# Altium PCB PCB_CPU_1.PcbDoc (part 2 of 2)
Units mm, origin at the board's own origin, x right, y up, seen from the top; angles counter-clockwise.
Board outline 195 x 54.5 mm, 2 copper layers (Top Layer, Bottom Layer); 53 components, 42 nets, 196 pads, 9 vias.
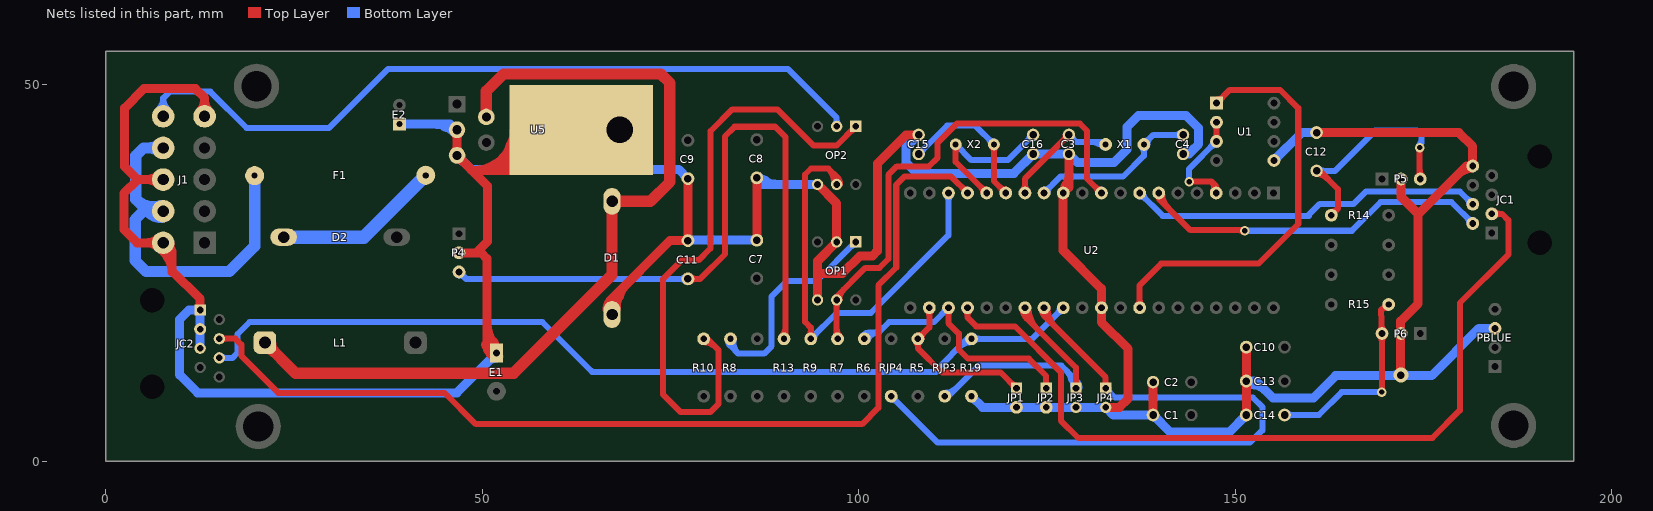
[diagram p2: the nets of this part, all layers, seen from the top]

## Via types
v1: diameter 1.27, hole 0.711, Top Layer to Bottom Layer, 8 vias
v2: diameter 2, hole 1, Top Layer to Bottom Layer, 1 vias

## Nets (pads, with @x,y where several pads share a name; then routed paths per layer and width w, separated by ;. In a path a pad name is that pad's centre, name@x,y a point inside that pad or via, vN(x,y) a via of type N, cw(c..) or ccw(c..) an arc to the next point about the centre after c; other vN are vias at no path point) (continued)
GND: C1.2 C2.2 C3.2 C4.1 C7.2 C8.1 C9.1 C10.1 C11.2 C12.2 C13.1 C14.2 C15.2 C16.1 D1.1 E1.1 E2.1 J1.2 J1.6 J1.9 JC1.8 JC2.1 JC2.3 JC2.5 JP1.2 JP2.2 JP3.2 JP4.2 OP1.2 OP1.8 OP2.8 P4.2 P5.2 P6.2 PBLUE.3 R19.2 U1.5 U2.12 U2.31 U5.0 U5.3 U5.5 | length 875.7
  Top Layer w1.2: J1.2@7.625,29.025 4.175,29.025 2.4,30.8 2.4,35.6 4.225,37.425 ; J1.6@7.625,37.425 4.225,37.425 ; J1.2@7.674,29.026 8.795,27.905 ; J1.2@8.315,28.447 ccw(c9.222,27.685) 8.332,26.903 ; JC2.1@12.54,20.094 12.54,21.594 8.795,25.339 8.795,27.905 ; J1.9@13.125,45.825 13.125,48.275 11.9,49.5 5.075,49.5 2.5,46.925 2.5,39.15 4.225,37.425 ; U5.3@46.653,44.041 U5.5@46.653,40.641 50.7,36.594 50.7,29.175 49.22,27.695 P4.2@46.92,27.695 49.855,27.695 50.625,26.925 50.625,15.65 E1.1@51.9,14.375 ; 48.8,38.6 57.744,38.6 U5.0@63.161,44.017 ; 53.521,41.322 cw(c59.413,39.718) U5.0@59.765,45.814 ; D1.1@67.25,19.5 67.25,21.625 74.94,29.315 C11.2@77.328,29.315 C9.1@77.328,37.55 ; D1.1@67.767,20.302 cw(c69.117,20.737) 68.114,21.74 ; C7.2@86.481,29.371 C8.1@86.481,37.652 ; OP1.8@94.548,21.441 94.548,24.8 ; OP2.8@94.548,36.787 97.088,34.247 OP1.2@97.088,29.146 94.548,26.606 94.548,24.8 ; C15.2@107.971,43.361 106.311,43.361 102.5,39.55 102.5,27.95 101.85,27.3 100.2,27.3 97.85,24.95 94.698,24.95 94.548,24.8 ; C3.2@127.935,40.821 127.935,36.402 U2.12@127.173,35.64 127.173,28.002 132.253,22.922 U2.31@132.253,20.4 132.253,18.486 135.8,14.939 135.8,8.325 134.645,7.17 JP4.2@132.826,7.17 ; C1.2@139.107,6.15 C2.2@139.107,10.519 ; C14.2@151.493,6.15 C13.1@151.493,10.659 C10.1@151.493,15.167 ; C12.2@160.828,43.666 179.734,43.666 181.57,41.83 JC1.8@181.57,39.22 180.72,39.22 174.325,32.825 174.325,20.95 171.99,18.615 171.99,11.485 v2(172.025,11.45) ; P5.2@172.065,37.5 172.065,35.11 174.325,32.85 ; 180.486,38.68 ccw(c180.117,40.059) JC1.8@181.353,39.345 ; 5.452,29.025 cw(c5.452,26.852) 6.989,28.389 ccw(c5.452,26.852) 5.452,29.025 ; 5.452,29.025 ccw(c5.452,31.198) 6.989,29.661 cw(c5.452,31.198) 5.452,29.025 ; 5.452,37.425 cw(c5.452,35.252) 6.989,36.789 ccw(c5.452,35.252) 5.452,37.425 ; 5.452,37.425 ccw(c5.452,39.598) 6.989,38.061 cw(c5.452,39.598) 5.452,37.425 ; 8.795,27.905 cw(c9.536,28.646) 8.508,28.85 ccw(c9.536,28.646) 8.795,27.905 ; 8.795,27.905 ccw(c8.11,27.22) 7.858,28.156 cw(c8.11,27.22) 8.795,27.905 ; 13.125,47.998 cw(c10.952,47.998) 12.489,46.461 ccw(c10.952,47.998) 13.125,47.998 ; 13.125,47.998 ccw(c15.298,47.998) 13.761,46.461 cw(c15.298,47.998) 13.125,47.998 ; U5.5@46.299,40.995 ccw(c45.446,41.848) 46.653,41.848 ; U5.5@46.299,40.995 ccw(c45.446,41.848) 46.653,41.848 ; U5.5@46.299,40.995 ccw(c45.446,41.848) 46.653,41.848 ; U5.3@46.299,43.687 cw(c45.446,42.834) 46.653,42.834 ; U5.3@46.299,43.687 cw(c45.446,42.834) 46.653,42.834 ; U5.3@46.299,43.687 cw(c45.446,42.834) 46.653,42.834 ; U5.5@46.653,40.141 cw(c46.653,38.934) 47.507,39.787 ; U5.5@46.653,40.141 cw(c46.653,38.934) 47.507,39.787 ; U5.5@46.653,40.141 cw(c46.653,38.934) 47.507,39.787 ; 46.653,41.848 ccw(c47.86,41.848) U5.5@47.007,40.995 ; 46.653,41.848 ccw(c47.86,41.848) U5.5@47.007,40.995 ; 46.653,41.848 ccw(c47.86,41.848) U5.5@47.007,40.995 ; 46.653,42.834 cw(c47.86,42.834) U5.3@47.007,43.687 ; 46.653,42.834 cw(c47.86,42.834) U5.3@47.007,43.687 ; 46.653,42.834 cw(c47.86,42.834) U5.3@47.007,43.687 ; U5.5@47.153,40.641 ccw(c48.36,40.641) 47.507,39.787 ; U5.5@47.153,40.641 ccw(c48.36,40.641) 47.507,39.787 ; U5.5@47.153,40.641 ccw(c48.36,40.641) 47.507,39.787 ; 50.43,15.485 ccw(c51.395,16.043) E1.1@51.808,15.007 ; 50.43,15.485 ccw(c51.395,16.043) E1.1@51.808,15.007 ; 50.43,15.485 ccw(c51.395,16.043) E1.1@51.808,15.007 ; 50.625,15.56 ccw(c52.685,15.56) E1.1@51.228,14.103 ; 50.625,15.56 ccw(c52.685,15.56) E1.1@51.228,14.103 ; 50.625,15.56 ccw(c52.685,15.56) E1.1@51.228,14.103 ; 50.625,18.457 ccw(c55.582,18.457) E1.1@52.077,14.952 ; 50.625,18.457 ccw(c55.582,18.457) E1.1@52.077,14.952 ; 50.625,18.457 ccw(c55.582,18.457) E1.1@52.077,14.952 ; 50.79,15.485 ccw(c51.9,16.594) E1.1@51.9,15.025 ; 50.79,15.485 ccw(c51.9,16.594) E1.1@51.9,15.025 ; 50.79,15.485 ccw(c51.9,16.594) E1.1@51.9,15.025 ; E1.1@51.124,14.284 ccw(c51.914,14.74) E1.1@52.251,13.892 ; E1.1@51.124,14.284 ccw(c51.914,14.74) E1.1@52.251,13.892 ; E1.1@51.124,14.284 ccw(c51.914,14.74) E1.1@52.251,13.892 ; 51.516,15.923 cw(c50.279,15.209) E1.1@51.659,14.84 ; 51.516,15.923 cw(c50.279,15.209) E1.1@51.659,14.84 ; 51.516,15.923 cw(c50.279,15.209) E1.1@51.659,14.84 ; D1.1@66.593,20.135 cw(c68.604,20.135) 67.182,21.557 ; D1.1@66.593,20.135 cw(c68.604,20.135) 67.182,21.557 ; D1.1@66.593,20.135 cw(c68.604,20.135) 67.182,21.557 ; D1.1@66.866,20.519 ccw(c65.939,21.446) 67.25,21.446 ; D1.1@66.866,20.519 ccw(c65.939,21.446) 67.25,21.446 ; D1.1@66.866,20.519 ccw(c65.939,21.446) 67.25,21.446 ; D1.1@66.978,20.605 ccw(c65.428,23.291) 68.424,22.489 ; D1.1@66.978,20.605 ccw(c65.428,23.291) 68.424,22.489 ; D1.1@66.978,20.605 ccw(c65.428,23.291) 68.424,22.489 ; 67.25,21.446 ccw(c68.561,21.446) D1.1@67.634,20.519 ; 67.25,21.446 ccw(c68.561,21.446) D1.1@67.634,20.519 ; 67.25,21.446 ccw(c68.561,21.446) D1.1@67.634,20.519 ; D1.1@67.793,20.135 cw(c72.701,20.135) 69.231,23.606 ; D1.1@67.793,20.135 cw(c72.701,20.135) 69.231,23.606 ; D1.1@67.793,20.135 cw(c72.701,20.135) 69.231,23.606 ; U2.12@126.996,35.817 ccw(c124.73,38.083) 127.935,38.083 ; U2.12@126.996,35.817 ccw(c124.73,38.083) 127.935,38.083 ; U2.12@126.996,35.817 ccw(c124.73,38.083) 127.935,38.083 ; U2.12@127.415,35.704 cw(c128.794,36.074) 127.557,36.788 ; U2.12@127.415,35.704 cw(c128.794,36.074) 127.557,36.788 ; U2.12@127.415,35.704 cw(c128.794,36.074) 127.557,36.788 ; J1.2@7.126,28.276 cw(c5.047,25.158) 8.795,25.158 ccw(c5.047,25.158) J1.2@7.126,28.276 ; J1.2@7.791,29.275 cw(c6.542,27.4) 8.795,27.4 ccw(c6.542,27.4) J1.2@7.791,29.275 ; 48.8,38.6 ccw(c48.8,44.061) 54.261,44.039 cw(c48.8,44.061) 48.8,38.6 ; 50.005,38.6 ccw(c50.005,44.056) 55.461,44.034 cw(c50.005,44.056) 50.005,38.6 ; 51.21,38.6 ccw(c51.21,44.051) 56.661,44.029 cw(c51.21,44.051) 51.21,38.6 ; 52.415,38.6 ccw(c52.415,44.046) 57.861,44.024 cw(c52.415,44.046) 52.415,38.6 ; 53.62,38.6 ccw(c53.62,44.041) 59.061,44.019 cw(c53.62,44.041) 53.62,38.6 ; U5.0@54.825,38.6 ccw(c54.825,44.037) 60.261,44.015 cw(c54.825,44.037) U5.0@54.825,38.6 ; U5.0@56.029,38.6 ccw(c56.029,44.032) 61.461,44.01 cw(c56.029,44.032) U5.0@56.029,38.6 ; 171.99,12.5 ccw(c173.075,12.5) 172.308,11.733 cw(c173.075,12.5) 171.99,12.5 ; 179.692,38.192 cw(c181.57,36.314) 181.57,38.97 ccw(c181.57,36.314) 179.692,38.192
  Bottom Layer w1.2: JC2.5@12.54,15.014 JC2.3@12.54,17.554 JC2.1@12.54,20.094 11.04,20.094 9.8,18.854 9.8,11.5 12.2,9.1 46.625,9.1 E1.1@51.9,14.375 ; E2.1@39,44.775 45.75,44.775 U5.3@46.175,44.35 ; U5.5@46.653,40.641 48.519,38.775 76.103,38.775 C9.1@77.328,37.55 ; C11.2@77.328,29.315 77.384,29.371 C7.2@86.481,29.371 ; C8.1@86.481,37.652 87.346,36.787 OP2.8@94.548,36.787 ; C15.2@107.971,43.361 106.292,41.682 106.292,39.715 107.757,38.25 120.614,38.25 C16.1@123.185,40.821 C3.2@127.935,40.821 129.082,39.675 133.909,39.675 135.625,41.391 135.625,44.4 137.15,45.925 143.513,45.925 145.175,44.263 145.175,42.125 143.871,40.821 C4.1@143.099,40.821 ; R19.2@114.991,8.65 116.47,7.17 JP1.2@120.964,7.17 JP2.2@124.918,7.17 JP3.2@128.872,7.17 JP4.2@132.826,7.17 133.846,6.15 C1.2@139.107,6.15 141.383,3.875 149.218,3.875 C14.2@151.493,6.15 ; C13.1@151.493,10.659 152.791,10.659 155.025,8.425 160.425,8.425 163.375,11.375 176.1,11.375 182.382,17.657 PBLUE.3@184.526,17.657 ; C13.1@151.71,10.784 ccw(c152.946,11.498) 152.577,10.119 ; U1.5@155.164,39.958 158.872,43.666 C12.2@160.828,43.666 ; 43.674,44.775 cw(c43.674,41.062) U5.3@46.299,43.687 ; 43.674,44.775 cw(c43.674,41.062) U5.3@46.299,43.687 ; 43.674,44.775 cw(c43.674,41.062) U5.3@46.299,43.687 ; 44.876,44.509 ccw(c45.671,45.886) U5.3@46.418,44.482 ; 44.876,44.509 ccw(c45.671,45.886) U5.3@46.418,44.482 ; 44.876,44.509 ccw(c45.671,45.886) U5.3@46.418,44.482 ; U5.5@46.653,40.141 cw(c46.653,38.934) 47.507,39.787 ; U5.5@46.653,40.141 cw(c46.653,38.934) 47.507,39.787 ; U5.5@46.653,40.141 cw(c46.653,38.934) 47.507,39.787 ; U5.5@47.153,40.641 ccw(c48.36,40.641) 47.507,39.787 ; U5.5@47.153,40.641 ccw(c48.36,40.641) 47.507,39.787 ; U5.5@47.153,40.641 ccw(c48.36,40.641) 47.507,39.787 ; 50.79,13.265 cw(c51.9,12.156) E1.1@51.9,13.725 ; 50.79,13.265 cw(c51.9,12.156) E1.1@51.9,13.725 ; 50.79,13.265 cw(c51.9,12.156) E1.1@51.9,13.725 ; C8.1@86.546,37.41 cw(c86.915,36.031) 87.629,37.268 ; C8.1@86.546,37.41 cw(c86.915,36.031) 87.629,37.268 ; C8.1@86.546,37.41 cw(c86.915,36.031) 87.629,37.268 ; C8.1@86.658,37.829 ccw(c89.173,40.344) 89.173,36.787 ; C8.1@86.658,37.829 ccw(c89.173,40.344) 89.173,36.787 ; C8.1@86.658,37.829 ccw(c89.173,40.344) 89.173,36.787 ; C4.1@143.099,41.046 ccw(c143.099,43.455) 144.802,41.752 ; C4.1@143.099,41.046 ccw(c143.099,43.455) 144.802,41.752 ; C4.1@143.099,41.046 ccw(c143.099,43.455) 144.802,41.752 ; C4.1@143.294,40.709 cw(c144.407,40.066) 144.074,41.308 ; C4.1@143.294,40.709 cw(c144.407,40.066) 144.074,41.308 ; C4.1@143.294,40.709 cw(c144.407,40.066) 144.074,41.308 ; C13.1@151.493,10.409 cw(c151.493,6.672) 154.135,9.315 ccw(c151.493,6.672) C13.1@151.493,10.409 ; 170.878,11.375 ccw(c170.878,12.597) 171.742,11.733 cw(c170.878,12.597) 170.878,11.375 ; v2@172.308,11.733 ccw(c173.172,12.597) 173.172,11.375 cw(c173.172,12.597) v2@172.308,11.733
JUMPER_1: JP1.1 R5.1 U2.22 | length 40.6
  Top Layer w0.8: U2.22@109.393,20.4 109.393,17.786 R5.1@107.877,16.27 107.877,14.998 111.075,11.8 118.874,11.8 JP1.1@120.964,9.71 ; R5.1@107.558,15.952 cw(c106.79,15.184) 107.877,15.184 ; R5.1@107.558,15.952 cw(c106.79,15.184) 107.877,15.184 ; R5.1@107.558,15.952 cw(c106.79,15.184) 107.877,15.184 ; 107.877,15.184 cw(c108.963,15.184) R5.1@108.195,15.952 ; 107.877,15.184 cw(c108.963,15.184) R5.1@108.195,15.952 ; 107.877,15.184 cw(c108.963,15.184) R5.1@108.195,15.952 ; R5.1@107.877,16.72 ccw(c107.877,17.806) 108.645,17.038 ; R5.1@107.877,16.72 ccw(c107.877,17.806) 108.645,17.038 ; R5.1@107.877,16.72 ccw(c107.877,17.806) 108.645,17.038 ; R5.1@108.327,16.27 cw(c109.413,16.27) 108.645,17.038 ; R5.1@108.327,16.27 cw(c109.413,16.27) 108.645,17.038 ; R5.1@108.327,16.27 cw(c109.413,16.27) 108.645,17.038 ; U2.22@109.075,20.082 cw(c108.307,19.313) 109.393,19.313 ; U2.22@109.075,20.082 cw(c108.307,19.313) 109.393,19.313 ; U2.22@109.075,20.082 cw(c108.307,19.313) 109.393,19.313 ; 109.393,19.313 cw(c110.48,19.313) U2.22@109.711,20.082 ; 109.393,19.313 cw(c110.48,19.313) U2.22@109.711,20.082 ; 109.393,19.313 cw(c110.48,19.313) U2.22@109.711,20.082 ; JP1.1@120.366,10.308 cw(c119.769,9.71) JP1.1@120.614,9.71 ; JP1.1@120.366,10.308 ccw(c120.964,10.905) JP1.1@120.964,10.06 ; JP1.1@120.366,10.308 cw(c119.769,9.71) JP1.1@120.614,9.71 ; JP1.1@120.366,10.308 ccw(c120.964,10.905) JP1.1@120.964,10.06 ; JP1.1@120.366,10.308 cw(c119.769,9.71) JP1.1@120.614,9.71 ; JP1.1@120.366,10.308 ccw(c120.964,10.905) JP1.1@120.964,10.06
JUMPER_2: JP2.1 R6.1 U2.23 | length 63
  Top Layer w0.8: U2.23@111.933,20.4 111.933,18.342 113.325,16.95 113.325,14.85 114.525,13.65 122.6,13.65 124.918,11.332 JP2.1@124.918,9.71 ; U2.23@111.615,20.082 cw(c110.847,19.313) 111.933,19.313 ; U2.23@111.615,20.082 cw(c110.847,19.313) 111.933,19.313 ; U2.23@111.615,20.082 cw(c110.847,19.313) 111.933,19.313 ; 111.933,19.313 cw(c113.02,19.313) U2.23@112.251,20.082 ; 111.933,19.313 cw(c113.02,19.313) U2.23@112.251,20.082 ; 111.933,19.313 cw(c113.02,19.313) U2.23@112.251,20.082 ; JP2.1@124.67,9.958 ccw(c124.073,10.555) 124.918,10.555 ; JP2.1@124.67,9.958 ccw(c124.073,10.555) 124.918,10.555 ; JP2.1@124.67,9.958 ccw(c124.073,10.555) 124.918,10.555 ; 124.918,10.555 ccw(c125.763,10.555) JP2.1@125.165,9.958 ; 124.918,10.555 ccw(c125.763,10.555) JP2.1@125.165,9.958 ; 124.918,10.555 ccw(c125.763,10.555) JP2.1@125.165,9.958
  Bottom Layer w0.8: R6.1@100.763,16.27 100.763,16.488 101.4,17.125 ; U2.23@111.933,20.4 110.033,18.5 104.05,18.5 102.675,17.125 ; R6.1@100.437,16.397 cw(c101.503,15.98) 101.503,17.125 ; R6.1@100.437,16.397 cw(c101.503,15.98) 101.503,17.125 ; R6.1@100.437,16.397 cw(c101.503,15.98) 101.503,17.125 ; R6.1@100.952,16.678 ccw(c101.228,17.27) 101.754,16.883 ; R6.1@100.952,16.678 ccw(c101.228,17.27) 101.754,16.883 ; R6.1@100.952,16.678 ccw(c101.228,17.27) 101.754,16.883 ; R6.1@101.182,16.106 cw(c102.675,15.521) 102.675,17.125 ; R6.1@101.182,16.106 cw(c102.675,15.521) 102.675,17.125 ; R6.1@101.182,16.106 cw(c102.675,15.521) 102.675,17.125 ; R6.1@101.198,16.383 cw(c101.947,16.578) 101.4,17.125 ; R6.1@101.198,16.383 cw(c101.947,16.578) 101.4,17.125 ; R6.1@101.198,16.383 cw(c101.947,16.578) 101.4,17.125 ; 101.4,17.125 102.675,17.125 ; 111.165,19.632 cw(c111.933,18.863) U2.23@111.933,19.95 ; 111.165,19.632 ccw(c110.397,20.4) U2.23@111.483,20.4 ; 111.165,19.632 cw(c111.933,18.863) U2.23@111.933,19.95 ; 111.165,19.632 ccw(c110.397,20.4) U2.23@111.483,20.4 ; 111.165,19.632 cw(c111.933,18.863) U2.23@111.933,19.95 ; 111.165,19.632 ccw(c110.397,20.4) U2.23@111.483,20.4
JUMPER_3: JP3.1 RJP3.1 U2.27 | length 91.3
  Top Layer w0.8: U2.27@122.093,20.4 122.093,19.232 128.872,12.453 JP3.1@128.872,9.71 ; U2.27@122.521,20.262 ccw(c123.64,19.901) 122.809,19.069 ; U2.27@121.743,20.4 ccw(c123.718,20.4) 122.322,19.003 ; U2.27@121.743,20.4 ccw(c123.718,20.4) 122.322,19.003 ; U2.27@121.743,20.4 ccw(c123.718,20.4) 122.322,19.003 ; U2.27@121.775,20.082 cw(c121.007,19.313) 122.093,19.313 ; U2.27@121.775,20.082 cw(c121.007,19.313) 122.093,19.313 ; U2.27@121.775,20.082 cw(c121.007,19.313) 122.093,19.313 ; U2.27@121.868,20.01 cw(c120.583,17.784) 123.066,18.449 ; U2.27@121.868,20.01 cw(c120.583,17.784) 123.066,18.449 ; U2.27@121.868,20.01 cw(c120.583,17.784) 123.066,18.449 ; 122.093,19.313 cw(c123.18,19.313) U2.27@122.411,20.082 ; 122.093,19.313 cw(c123.18,19.313) U2.27@122.411,20.082 ; 122.093,19.313 cw(c123.18,19.313) U2.27@122.411,20.082 ; U2.27@122.543,20.4 ccw(c126.449,20.4) 123.687,17.638 ; U2.27@122.543,20.4 ccw(c126.449,20.4) 123.687,17.638 ; U2.27@122.543,20.4 ccw(c126.449,20.4) 123.687,17.638 ; JP3.1@128.624,9.958 ccw(c128.027,10.555) 128.872,10.555 ; JP3.1@128.624,9.958 ccw(c128.027,10.555) 128.872,10.555 ; JP3.1@128.624,9.958 ccw(c128.027,10.555) 128.872,10.555 ; 128.872,10.555 ccw(c129.717,10.555) JP3.1@129.119,9.958 ; 128.872,10.555 ccw(c129.717,10.555) JP3.1@129.119,9.958 ; 128.872,10.555 ccw(c129.717,10.555) JP3.1@129.119,9.958
  Bottom Layer w0.8: RJP3.1@111.434,8.65 111.9,8.65 115.95,12.7 126.95,12.7 128.872,10.778 JP3.1@128.872,9.71 ; 128.315,10.745 cw(c127.668,10.099) JP3.1@128.539,9.818 ; RJP3.1@111.434,9.1 ccw(c111.434,11.312) 112.998,9.748 ; RJP3.1@111.434,9.1 ccw(c111.434,11.312) 112.998,9.748 ; RJP3.1@111.434,9.1 ccw(c111.434,11.312) 112.998,9.748 ; 127.519,12.131 cw(c125.099,9.71) JP3.1@128.522,9.71 ; 127.519,12.131 cw(c125.099,9.71) JP3.1@128.522,9.71 ; 127.519,12.131 cw(c125.099,9.71) JP3.1@128.522,9.71 ; 128.115,11.227 ccw(c130.046,11.745) JP3.1@129.047,10.014 ; 128.115,11.227 ccw(c130.046,11.745) JP3.1@129.047,10.014 ; 128.115,11.227 ccw(c130.046,11.745) JP3.1@129.047,10.014 ; JP3.1@128.624,9.958 ccw(c128.027,10.555) 128.872,10.555 ; JP3.1@128.624,9.958 ccw(c128.027,10.555) 128.872,10.555 ; JP3.1@128.624,9.958 ccw(c128.027,10.555) 128.872,10.555 ; 128.872,10.555 ccw(c129.717,10.555) JP3.1@129.119,9.958 ; 128.872,10.555 ccw(c129.717,10.555) JP3.1@129.119,9.958 ; 128.872,10.555 ccw(c129.717,10.555) JP3.1@129.119,9.958 ; 128.885,10.765 cw(c127.83,9.71) JP3.1@129.322,9.71 ; 128.885,10.765 cw(c127.83,9.71) JP3.1@129.322,9.71 ; 128.885,10.765 cw(c127.83,9.71) JP3.1@129.322,9.71
JUMPER_4: JP4.1 RJP4.1 U2.28 | length 129.5
  Top Layer w0.8: U2.28@124.633,20.4 124.633,19.342 ; U2.28@125.061,20.262 ccw(c126.18,19.901) 125.349,19.069 ; JP4.1@132.826,9.71 132.826,11.149 124.633,19.342 ; U2.28@124.283,20.4 ccw(c125.992,20.4) 124.784,19.191 ; U2.28@124.283,20.4 ccw(c125.992,20.4) 124.784,19.191 ; U2.28@124.283,20.4 ccw(c125.992,20.4) 124.784,19.191 ; U2.28@124.321,20.076 cw(c123.615,19.342) 124.633,19.342 ; U2.28@124.321,20.076 cw(c123.615,19.342) 124.633,19.342 ; U2.28@124.321,20.076 cw(c123.615,19.342) 124.633,19.342 ; U2.28@124.408,20.01 cw(c123.123,17.784) 125.606,18.449 ; U2.28@124.408,20.01 cw(c123.123,17.784) 125.606,18.449 ; U2.28@124.408,20.01 cw(c123.123,17.784) 125.606,18.449 ; 124.633,19.342 cw(c125.652,19.342) U2.28@124.945,20.076 ; 124.633,19.342 cw(c125.652,19.342) U2.28@124.945,20.076 ; 124.633,19.342 cw(c125.652,19.342) U2.28@124.945,20.076 ; U2.28@125.083,20.4 ccw(c128.724,20.4) 126.15,17.825 ; U2.28@125.083,20.4 ccw(c128.724,20.4) 126.15,17.825 ; U2.28@125.083,20.4 ccw(c128.724,20.4) 126.15,17.825 ; JP4.1@132.578,9.958 ccw(c131.981,10.555) 132.826,10.555 ; JP4.1@132.578,9.958 ccw(c131.981,10.555) 132.826,10.555 ; JP4.1@132.578,9.958 ccw(c131.981,10.555) 132.826,10.555 ; 132.826,10.555 ccw(c133.671,10.555) JP4.1@133.073,9.958 ; 132.826,10.555 ccw(c133.671,10.555) JP4.1@133.073,9.958 ; 132.826,10.555 ccw(c133.671,10.555) JP4.1@133.073,9.958
  Bottom Layer w0.8: RJP4.1@104.32,8.65 110.495,2.475 151.975,2.475 153.625,4.125 153.625,7.225 152.375,8.475 134.061,8.475 JP4.1@132.826,9.71 ; RJP4.1@104.32,8.2 cw(c104.32,7.114) 105.088,7.882 ; RJP4.1@104.32,8.2 cw(c104.32,7.114) 105.088,7.882 ; RJP4.1@104.32,8.2 cw(c104.32,7.114) 105.088,7.882 ; RJP4.1@104.77,8.65 ccw(c105.856,8.65) 105.088,7.882 ; RJP4.1@104.77,8.65 ccw(c105.856,8.65) 105.088,7.882 ; RJP4.1@104.77,8.65 ccw(c105.856,8.65) 105.088,7.882 ; JP4.1@132.826,9.36 cw(c132.826,8.515) JP4.1@133.423,9.113 ; JP4.1@132.826,9.36 cw(c132.826,8.515) JP4.1@133.423,9.113 ; JP4.1@132.826,9.36 cw(c132.826,8.515) JP4.1@133.423,9.113 ; JP4.1@133.176,9.71 ccw(c134.021,9.71) JP4.1@133.423,9.113 ; JP4.1@133.176,9.71 ccw(c134.021,9.71) JP4.1@133.423,9.113 ; JP4.1@133.176,9.71 ccw(c134.021,9.71) JP4.1@133.423,9.113
NetC3_1: C3.1 U2.14 X1.1 | length 38.1
  Top Layer w0.8: U2.14@122.093,35.64 122.093,37.519 C3.1@127.935,43.361 ; U2.14@121.775,35.958 ccw(c121.007,36.726) 122.093,36.726 ; U2.14@121.775,35.958 ccw(c121.007,36.726) 122.093,36.726 ; U2.14@121.775,35.958 ccw(c121.007,36.726) 122.093,36.726 ; 122.093,36.726 ccw(c123.18,36.726) U2.14@122.411,35.958 ; 122.093,36.726 ccw(c123.18,36.726) U2.14@122.411,35.958 ; 122.093,36.726 ccw(c123.18,36.726) U2.14@122.411,35.958 ; 127.21,42.636 cw(c127.935,41.91) C3.1@127.935,42.936 ; 127.21,42.636 ccw(c126.484,43.361) C3.1@127.51,43.361 ; 127.21,42.636 cw(c127.935,41.91) C3.1@127.935,42.936 ; 127.21,42.636 ccw(c126.484,43.361) C3.1@127.51,43.361 ; 127.21,42.636 cw(c127.935,41.91) C3.1@127.935,42.936 ; 127.21,42.636 ccw(c126.484,43.361) C3.1@127.51,43.361
  Bottom Layer w0.8: C3.1@127.935,43.361 128.872,42.425 132.478,42.425 X1.1@132.812,42.091 ; C3.1@127.935,42.936 cw(c127.935,41.91) 128.661,42.636 ; C3.1@127.935,42.936 cw(c127.935,41.91) 128.661,42.636 ; C3.1@127.935,42.936 cw(c127.935,41.91) 128.661,42.636 ; C3.1@128.36,43.361 ccw(c129.386,43.361) 128.661,42.636 ; C3.1@128.36,43.361 ccw(c129.386,43.361) 128.661,42.636 ; C3.1@128.36,43.361 ccw(c129.386,43.361) 128.661,42.636 ; 130.92,42.425 cw(c130.92,40.2) X1.1@132.494,41.773 ; 130.92,42.425 cw(c130.92,40.2) X1.1@132.494,41.773 ; 130.92,42.425 cw(c130.92,40.2) X1.1@132.494,41.773 ; 131.714,42.224 ccw(c132.002,42.724) X1.1@132.457,42.368 ; 131.714,42.224 ccw(c132.002,42.724) X1.1@132.457,42.368 ; 131.714,42.224 ccw(c132.002,42.724) X1.1@132.457,42.368
NetC4_2: C4.2 U2.13 X1.2 | length 42.7
  Bottom Layer w0.8: U2.13@124.633,35.64 126.803,37.81 135.118,37.81 137.892,40.585 X1.2@137.892,42.091 139.162,43.361 C4.2@143.099,43.361 ; U2.13@124.633,36.09 ccw(c124.633,37.176) 125.401,36.408 ; U2.13@124.633,36.09 ccw(c124.633,37.176) 125.401,36.408 ; U2.13@124.633,36.09 ccw(c124.633,37.176) 125.401,36.408 ; U2.13@125.083,35.64 cw(c126.17,35.64) 125.401,36.408 ; U2.13@125.083,35.64 cw(c126.17,35.64) 125.401,36.408 ; U2.13@125.083,35.64 cw(c126.17,35.64) 125.401,36.408 ; X1.2@137.574,41.773 cw(c136.806,41.005) 137.892,41.005 ; X1.2@137.574,41.773 cw(c136.806,41.005) 137.892,41.005 ; X1.2@137.574,41.773 cw(c136.806,41.005) 137.892,41.005 ; 137.892,41.005 cw(c138.978,41.005) X1.2@138.21,41.773 ; 137.892,41.005 cw(c138.978,41.005) X1.2@138.21,41.773 ; 137.892,41.005 cw(c138.978,41.005) X1.2@138.21,41.773 ; X1.2@137.892,42.541 ccw(c137.892,43.628) 138.66,42.86 ; X1.2@137.892,42.541 ccw(c137.892,43.628) 138.66,42.86 ; X1.2@137.892,42.541 ccw(c137.892,43.628) 138.66,42.86 ; X1.2@138.342,42.091 cw(c139.428,42.091) 138.66,42.86 ; X1.2@138.342,42.091 cw(c139.428,42.091) 138.66,42.86 ; X1.2@138.342,42.091 cw(c139.428,42.091) 138.66,42.86 ; 142.073,43.361 cw(c142.073,42.335) C4.2@142.798,43.061 ; 142.073,43.361 ccw(c142.073,44.387) C4.2@142.798,43.662 ; 142.073,43.361 cw(c142.073,42.335) C4.2@142.798,43.061 ; 142.073,43.361 ccw(c142.073,44.387) C4.2@142.798,43.662 ; 142.073,43.361 cw(c142.073,42.335) C4.2@142.798,43.061 ; 142.073,43.361 ccw(c142.073,44.387) C4.2@142.798,43.662
NetC12_1: C12.1 P5.3 R14.2 | length 42.8
  Top Layer w0.8: C12.1@160.828,38.161 cw(c160.828,36.144) 162.255,37.57 ; C12.1@160.828,38.586 161.239,38.586 163.675,36.15 163.675,33.584 R14.2@162.784,32.693 ; R14.2@162.784,33.143 ccw(c162.784,34.23) 163.552,33.462 ccw(c164.32,32.693) R14.2@163.234,32.693 ; v1(174.525,41.675) 174.525,37.58 P5.3@174.605,37.5 ; P5.3@174.287,37.818 ccw(c173.712,38.393) 174.525,38.393 cw(c173.712,38.393) P5.3@174.287,37.818 ; 174.525,38.78 ccw(c175.885,38.78) 174.923,37.818 cw(c175.885,38.78) 174.525,38.78
  Bottom Layer w0.8: C12.1@160.828,38.586 163.286,38.586 168.625,43.925 174.2,43.925 174.75,43.375 174.75,42.325 ; v1@174.475,42.05 174.75,42.325 ; 161.854,38.586 cw(c161.854,39.612) 161.129,38.887 ccw(c161.854,39.612) 161.854,38.586 ; 161.854,38.586 ccw(c161.854,37.56) 161.129,38.286 cw(c161.854,37.56) 161.854,38.586 ; 174.75,42.325 cw(c174.296,42.325) 174.447,41.897 ccw(c174.296,42.325) 174.75,42.325 ; v1@174.359,41.841 ccw(c173.414,42.786) 174.75,42.786 cw(c173.414,42.786) v1@174.359,41.841
NetC14_1: C14.1 P6.3 R15.2 | length 38.4
  Top Layer w0.8: v1(169.495,9.2) 169.495,16.975 169.395,20.095 ; R15.2@170.404,20.832 170.132,20.832 169.395,20.095 ; 169.395,20.095 cw(c170.142,19.348) 170.326,20.388 ccw(c170.142,19.348) 169.395,20.095 ; P6.3@169.197,17.283 ccw(c168.479,17.956) 169.463,17.987 cw(c168.479,17.956) P6.3@169.197,17.283 ; P6.3@169.207,16.657 cw(c168.511,15.961) 169.495,15.961 ccw(c168.511,15.961) P6.3@169.207,16.657 ; 169.458,18.132 ccw(c170.646,18.17) 169.833,17.303 cw(c170.646,18.17) 169.458,18.132 ; 169.495,15.816 cw(c170.684,15.816) 169.843,16.657 ccw(c170.684,15.816) 169.495,15.816
  Bottom Layer w0.8: C14.1@156.573,6.15 161.125,6.15 164.175,9.2 v1@169.225,9.2 ; 157.66,6.15 cw(c157.66,7.237) 156.891,6.469 ccw(c157.66,7.237) 157.66,6.15 ; 157.66,6.15 ccw(c157.66,5.064) 156.891,5.832 cw(c157.66,5.064) 157.66,6.15
NetC15_1: C15.1 U2.15 X2.1 | length 38.5
  Top Layer w0.8: X2.1@117.978,42.091 117.978,37.215 U2.15@119.553,35.64 ; X2.1@117.704,41.818 cw(c117.043,41.156) 117.978,41.156 ; X2.1@117.704,41.818 cw(c117.043,41.156) 117.978,41.156 ; X2.1@117.704,41.818 cw(c117.043,41.156) 117.978,41.156 ; 117.978,41.156 cw(c118.914,41.156) X2.1@118.252,41.818 ; 117.978,41.156 cw(c118.914,41.156) X2.1@118.252,41.818 ; 117.978,41.156 cw(c118.914,41.156) X2.1@118.252,41.818 ; 118.785,36.408 cw(c118.017,35.64) U2.15@119.103,35.64 ; 118.785,36.408 ccw(c119.553,37.176) U2.15@119.553,36.09 ; 118.785,36.408 cw(c118.017,35.64) U2.15@119.103,35.64 ; 118.785,36.408 ccw(c119.553,37.176) U2.15@119.553,36.09 ; 118.785,36.408 cw(c118.017,35.64) U2.15@119.103,35.64 ; 118.785,36.408 ccw(c119.553,37.176) U2.15@119.553,36.09
  Bottom Layer w0.8: C15.1@107.971,40.821 111.736,44.587 115.483,44.587 X2.1@117.978,42.091 ; C15.1@107.971,41.246 ccw(c107.971,42.272) 108.696,41.547 ; C15.1@107.971,41.246 ccw(c107.971,42.272) 108.696,41.547 ; C15.1@107.971,41.246 ccw(c107.971,42.272) 108.696,41.547 ; C15.1@108.396,40.821 cw(c109.422,40.821) 108.696,41.547 ; C15.1@108.396,40.821 cw(c109.422,40.821) 108.696,41.547 ; C15.1@108.396,40.821 cw(c109.422,40.821) 108.696,41.547 ; 117.317,42.753 cw(c116.656,42.091) X2.1@117.591,42.091 ; 117.317,42.753 ccw(c117.978,43.414) X2.1@117.978,42.479 ; 117.317,42.753 cw(c116.656,42.091) X2.1@117.591,42.091 ; 117.317,42.753 ccw(c117.978,43.414) X2.1@117.978,42.479 ; 117.317,42.753 cw(c116.656,42.091) X2.1@117.591,42.091 ; 117.317,42.753 ccw(c117.978,43.414) X2.1@117.978,42.479
NetC16_2: C16.2 U2.16 X2.2 | length 39.5
  Top Layer w0.8: X2.2@112.898,42.091 112.898,39.755 U2.16@117.013,35.64 ; X2.2@112.624,41.818 cw(c111.963,41.156) 112.898,41.156 ; X2.2@112.624,41.818 cw(c111.963,41.156) 112.898,41.156 ; X2.2@112.624,41.818 cw(c111.963,41.156) 112.898,41.156 ; 112.898,41.156 cw(c113.834,41.156) X2.2@113.172,41.818 ; 112.898,41.156 cw(c113.834,41.156) X2.2@113.172,41.818 ; 112.898,41.156 cw(c113.834,41.156) X2.2@113.172,41.818 ; 116.245,36.408 cw(c115.477,35.64) U2.16@116.563,35.64 ; 116.245,36.408 ccw(c117.013,37.176) U2.16@117.013,36.09 ; 116.245,36.408 cw(c115.477,35.64) U2.16@116.563,35.64 ; 116.245,36.408 ccw(c117.013,37.176) U2.16@117.013,36.09 ; 116.245,36.408 cw(c115.477,35.64) U2.16@116.563,35.64 ; 116.245,36.408 ccw(c117.013,37.176) U2.16@117.013,36.09
  Bottom Layer w0.8: X2.2@112.898,42.091 114.985,40.005 119.829,40.005 C16.2@123.185,43.361 ; X2.2@112.898,41.704 cw(c112.898,40.769) 113.56,41.43 ; X2.2@112.898,41.704 cw(c112.898,40.769) 113.56,41.43 ; X2.2@112.898,41.704 cw(c112.898,40.769) 113.56,41.43 ; X2.2@113.286,42.091 ccw(c114.221,42.091) 113.56,41.43 ; X2.2@113.286,42.091 ccw(c114.221,42.091) 113.56,41.43 ; X2.2@113.286,42.091 ccw(c114.221,42.091) 113.56,41.43 ; 122.46,42.636 cw(c123.185,41.91) C16.2@123.185,42.936 ; 122.46,42.636 ccw(c121.734,43.361) C16.2@122.76,43.361 ; 122.46,42.636 cw(c123.185,41.91) C16.2@123.185,42.936 ; 122.46,42.636 ccw(c121.734,43.361) C16.2@122.76,43.361 ; 122.46,42.636 cw(c123.185,41.91) C16.2@123.185,42.936 ; 122.46,42.636 ccw(c121.734,43.361) C16.2@122.76,43.361
NetD1_2: D1.2 L1.2 U5.2 | length 122.6
  Top Layer w1.5: L1.2@21.138,15.775 25.213,11.7 54.175,11.7 67.25,24.775 D1.2@67.25,34.525 72.325,34.525 74.925,37.125 74.925,50.25 73.725,51.45 52.825,51.45 50.553,49.178 U5.2@50.553,45.741 ; L1.2@21.138,15.025 cw(c21.138,13.214) 22.418,14.495 ; L1.2@21.138,15.025 cw(c21.138,13.214) 22.418,14.495 ; L1.2@21.138,15.025 cw(c21.138,13.214) 22.418,14.495 ; L1.2@21.888,15.775 ccw(c23.698,15.775) 22.418,14.495 ; L1.2@21.888,15.775 ccw(c23.698,15.775) 22.418,14.495 ; L1.2@21.888,15.775 ccw(c23.698,15.775) 22.418,14.495
NetD2_1: D2.1 F1.1 | length 22.3
  Bottom Layer w1.8: D2.1@23.625,29.775 34.285,29.775 F1.1@42.504,37.994
NetOP1_1: OP1.1 R8.2 | length 45.4
  Bottom Layer w0.8: R8.2@82.977,16.27 82.977,15.323 ; OP1.1@99.628,29.146 94.407,23.925 90.475,23.925 88.45,21.9 88.45,15.3 87.45,14.3 84,14.3 ; R8.2@82.633,16.335 ccw(c83.695,16.133) 82.931,15.369 ; R8.2@82.633,16.335 ccw(c83.695,16.133) 82.931,15.369 ; R8.2@82.633,16.335 ccw(c83.695,16.133) 82.931,15.369 ; R8.2@82.693,15.921 cw(c82.206,15.323) 82.977,15.323 ; R8.2@82.693,15.921 cw(c82.206,15.323) 82.977,15.323 ; R8.2@82.693,15.921 cw(c82.206,15.323) 82.977,15.323 ; 82.977,15.323 cw(c83.748,15.323) R8.2@83.261,15.921 ; 82.977,15.323 cw(c83.748,15.323) R8.2@83.261,15.921 ; 82.977,15.323 cw(c83.748,15.323) R8.2@83.261,15.921 ; 82.977,15.323 84,14.3 ; R8.2@83.419,16.186 ccw(c85.492,15.792) 84,14.3 ; R8.2@83.419,16.186 ccw(c85.492,15.792) 84,14.3 ; R8.2@83.419,16.186 ccw(c85.492,15.792) 84,14.3 ; OP1.1@99.03,28.549 cw(c99.628,27.951) OP1.1@99.628,28.796 ; OP1.1@99.03,28.549 ccw(c98.433,29.146) OP1.1@99.278,29.146 ; OP1.1@99.03,28.549 cw(c99.628,27.951) OP1.1@99.628,28.796 ; OP1.1@99.03,28.549 ccw(c98.433,29.146) OP1.1@99.278,29.146 ; OP1.1@99.03,28.549 cw(c99.628,27.951) OP1.1@99.628,28.796 ; OP1.1@99.03,28.549 ccw(c98.433,29.146) OP1.1@99.278,29.146
NetOP2_1: OP2.1 R10.2 | length 90.3
  Top Layer w0.8: R10.2@79.42,16.27 79.905,16.27 81.375,14.8 81.375,7.6 80.343,6.568 76.332,6.568 74,8.9 74,24.2 76.525,26.725 78.75,26.725 80.325,28.3 80.325,43.85 83.225,46.75 89.2,46.75 94.025,41.925 97.061,41.925 OP2.1@99.628,44.492 ; R10.2@79.42,15.82 cw(c79.42,13.562) 81.016,15.159 ; R10.2@79.42,15.82 cw(c79.42,13.562) 81.016,15.159 ; R10.2@79.42,15.82 cw(c79.42,13.562) 81.016,15.159 ; OP2.1@99.03,43.895 cw(c99.628,43.297) OP2.1@99.628,44.142 ; OP2.1@99.03,43.895 ccw(c98.433,44.492) OP2.1@99.278,44.492 ; OP2.1@99.03,43.895 cw(c99.628,43.297) OP2.1@99.628,44.142 ; OP2.1@99.03,43.895 ccw(c98.433,44.492) OP2.1@99.278,44.492 ; OP2.1@99.03,43.895 cw(c99.628,43.297) OP2.1@99.628,44.142 ; OP2.1@99.03,43.895 ccw(c98.433,44.492) OP2.1@99.278,44.492
OPTO_ALIMENTACION: OP1.7 R7.1 U2.10 | length 82.7
  Top Layer w0.8: R7.1@97.205,16.27 97.088,16.387 OP1.7@97.088,21.441 97.088,21.888 100.894,25.694 102.769,25.694 103.946,26.871 103.946,38.046 105.075,39.175 109.35,39.175 110.454,40.279 110.454,42.255 113.04,44.84 129.403,44.84 130.342,43.901 130.342,37.551 U2.10@132.253,35.64 ; OP1.7@96.84,21.193 cw(c96.243,20.596) 97.088,20.596 ; OP1.7@96.84,21.193 cw(c96.243,20.596) 97.088,20.596 ; OP1.7@96.84,21.193 cw(c96.243,20.596) 97.088,20.596 ; 97.088,17.64 ccw(c98.575,17.64) R7.1@97.524,16.588 ; 97.088,17.64 ccw(c98.575,17.64) R7.1@97.524,16.588 ; 97.088,17.64 ccw(c98.575,17.64) R7.1@97.524,16.588 ; 97.088,20.596 cw(c97.933,20.596) OP1.7@97.335,21.193 ; 97.088,20.596 cw(c97.933,20.596) OP1.7@97.335,21.193 ; 97.088,20.596 cw(c97.933,20.596) OP1.7@97.335,21.193 ; OP1.7@97.438,21.441 cw(c99.363,21.441) 98.002,22.802 ; OP1.7@97.438,21.441 cw(c99.363,21.441) 98.002,22.802 ; OP1.7@97.438,21.441 cw(c99.363,21.441) 98.002,22.802 ; 131.485,36.408 cw(c130.717,35.64) U2.10@131.803,35.64 ; 131.485,36.408 ccw(c132.253,37.176) U2.10@132.253,36.09 ; 131.485,36.408 cw(c130.717,35.64) U2.10@131.803,35.64 ; 131.485,36.408 ccw(c132.253,37.176) U2.10@132.253,36.09 ; 131.485,36.408 cw(c130.717,35.64) U2.10@131.803,35.64 ; 131.485,36.408 ccw(c132.253,37.176) U2.10@132.253,36.09
OPTO_PUERTA: OP2.7 R9.1 U2.18 | length 92.7
  Top Layer w0.8: R9.1@93.648,16.27 93.648,17.76 92.875,18.534 92.875,38.1 93.675,38.9 95.975,38.9 ; 96.655,37.821 cw(c96.026,37.288) OP2.7@96.771,36.936 ; OP2.7@97.088,36.787 97.088,37.787 95.975,38.9 ; R9.1@93.33,16.588 ccw(c92.562,17.356) 93.648,17.356 ; R9.1@93.33,16.588 ccw(c92.562,17.356) 93.648,17.356 ; R9.1@93.33,16.588 ccw(c92.562,17.356) 93.648,17.356 ; 93.648,17.356 ccw(c94.735,17.356) R9.1@93.967,16.588 ; 93.648,17.356 ccw(c94.735,17.356) R9.1@93.967,16.588 ; 93.648,17.356 ccw(c94.735,17.356) R9.1@93.967,16.588 ; 95.975,38.9 cw(c94.109,37.034) OP2.7@96.739,36.816 ; 95.975,38.9 cw(c94.109,37.034) OP2.7@96.739,36.816 ; 95.975,38.9 cw(c94.109,37.034) OP2.7@96.739,36.816 ; 96.459,38.361 ccw(c98.427,38.717) OP2.7@97.287,37.074 ; 96.459,38.361 ccw(c98.427,38.717) OP2.7@97.287,37.074 ; 96.459,38.361 ccw(c98.427,38.717) OP2.7@97.287,37.074 ; OP2.7@96.84,37.034 ccw(c96.243,37.632) 97.088,37.632 ; OP2.7@96.84,37.034 ccw(c96.243,37.632) 97.088,37.632 ; OP2.7@96.84,37.034 ccw(c96.243,37.632) 97.088,37.632 ; 97.088,37.632 ccw(c97.933,37.632) OP2.7@97.335,37.034 ; 97.088,37.632 ccw(c97.933,37.632) OP2.7@97.335,37.034 ; 97.088,37.632 ccw(c97.933,37.632) OP2.7@97.335,37.034 ; 97.195,37.68 cw(c96.363,36.847) OP2.7@97.536,36.749 ; 97.195,37.68 cw(c96.363,36.847) OP2.7@97.536,36.749 ; 97.195,37.68 cw(c96.363,36.847) OP2.7@97.536,36.749
  Bottom Layer w0.8: R9.1@93.648,16.27 97.078,19.7 101.615,19.7 111.933,30.018 U2.18@111.933,35.64 ; R9.1@93.648,16.72 ccw(c93.648,17.806) 94.417,17.038 ; R9.1@93.648,16.72 ccw(c93.648,17.806) 94.417,17.038 ; R9.1@93.648,16.72 ccw(c93.648,17.806) 94.417,17.038 ; R9.1@94.098,16.27 cw(c95.185,16.27) 94.417,17.038 ; R9.1@94.098,16.27 cw(c95.185,16.27) 94.417,17.038 ; R9.1@94.098,16.27 cw(c95.185,16.27) 94.417,17.038 ; U2.18@111.615,35.322 cw(c110.847,34.553) 111.933,34.553 ; U2.18@111.615,35.322 cw(c110.847,34.553) 111.933,34.553 ; U2.18@111.615,35.322 cw(c110.847,34.553) 111.933,34.553 ; 111.933,34.553 cw(c113.02,34.553) U2.18@112.251,35.322 ; 111.933,34.553 cw(c113.02,34.553) U2.18@112.251,35.322 ; 111.933,34.553 cw(c113.02,34.553) U2.18@112.251,35.322
P_RJ45: JC2.6 R19.1 U2.29 | length 140.2
  Bottom Layer w0.8: JC2.6@15.08,13.744 16.844,13.744 17.5,14.4 17.5,16.9 19.1,18.5 58,18.5 64.45,12.05 ; 64.6,11.875 110.375,11.875 ; 110.225,12.05 114.445,16.27 R19.1@114.991,16.27 123.043,16.27 U2.29@127.173,20.4 ; 15.925,13.744 cw(c15.925,14.589) 15.328,13.991 ccw(c15.925,14.589) 15.925,13.744 ; 15.925,13.744 ccw(c15.925,12.899) 15.328,13.496 cw(c15.925,12.899) 15.925,13.744 ; 113.291,15.116 cw(c114.991,13.415) R19.1@114.991,15.82 ; 113.291,15.116 cw(c114.991,13.415) R19.1@114.991,15.82 ; 113.291,15.116 cw(c114.991,13.415) R19.1@114.991,15.82 ; R19.1@115.309,15.952 cw(c116.077,15.184) 116.077,16.27 ; R19.1@115.309,15.952 cw(c116.077,15.184) 116.077,16.27 ; R19.1@115.309,15.952 cw(c116.077,15.184) 116.077,16.27 ; R19.1@115.309,16.588 ccw(c116.077,17.356) 116.077,16.27 ; R19.1@115.309,16.588 ccw(c116.077,17.356) 116.077,16.27 ; R19.1@115.309,16.588 ccw(c116.077,17.356) 116.077,16.27 ; 126.405,19.632 cw(c127.173,18.863) U2.29@127.173,19.95 ; 126.405,19.632 ccw(c125.637,20.4) U2.29@126.723,20.4 ; 126.405,19.632 cw(c127.173,18.863) U2.29@127.173,19.95 ; 126.405,19.632 ccw(c125.637,20.4) U2.29@126.723,20.4 ; 126.405,19.632 cw(c127.173,18.863) U2.29@127.173,19.95 ; 126.405,19.632 ccw(c125.637,20.4) U2.29@126.723,20.4
PUERTA: J1.10 OP2.2 | length 112.4
  Bottom Layer w0.8: J1.10@7.625,45.825 7.625,48.225 ; OP2.2@97.088,44.492 97.088,45.662 90.65,52.1 37.475,52.1 29.675,44.3 18.7,44.3 13.9,49.1 8.5,49.1 7.625,48.225 ; 7.625,48.225 cw(c5.557,48.225) 6.907,46.658 ccw(c5.557,48.225) 7.625,48.225 ; 7.625,48.225 ccw(c9.693,48.225) 8.343,46.658 cw(c9.693,48.225) 7.625,48.225 ; OP2.2@96.84,44.74 ccw(c96.243,45.337) 97.088,45.337 ; OP2.2@96.84,44.74 ccw(c96.243,45.337) 97.088,45.337 ; OP2.2@96.84,44.74 ccw(c96.243,45.337) 97.088,45.337 ; 97.088,45.337 ccw(c97.933,45.337) OP2.2@97.335,44.74 ; 97.088,45.337 ccw(c97.933,45.337) OP2.2@97.335,44.74 ; 97.088,45.337 ccw(c97.933,45.337) OP2.2@97.335,44.74
PWM: JC2.4 U2.17 | length 143.2
  Top Layer w0.8: JC2.4@15.08,16.284 17.216,16.284 18,15.5 18,14 22.9,9.1 45,9.1 49.15,4.95 100.48,4.95 102.625,7.095 102.625,23.375 105,25.75 105,36.725 106.125,37.85 112.263,37.85 U2.17@114.473,35.64 ; 15.925,16.284 cw(c15.925,17.129) 15.328,16.531 ccw(c15.925,17.129) 15.925,16.284 ; 15.925,16.284 ccw(c15.925,15.439) 15.328,16.036 cw(c15.925,15.439) 15.925,16.284 ; 113.705,36.408 cw(c112.937,35.64) U2.17@114.023,35.64 ; 113.705,36.408 ccw(c114.473,37.176) U2.17@114.473,36.09 ; 113.705,36.408 cw(c112.937,35.64) U2.17@114.023,35.64 ; 113.705,36.408 ccw(c114.473,37.176) U2.17@114.473,36.09 ; 113.705,36.408 cw(c112.937,35.64) U2.17@114.023,35.64 ; 113.705,36.408 ccw(c114.473,37.176) U2.17@114.473,36.09
RE_485: U1.2 U1.3 U2.4 | length 37.4
  Top Layer w0.8: v1(143.901,37.144) 146.881,37.144 ; U2.4@147.493,35.64 147.493,36.532 146.881,37.144 ; U1.3@147.544,42.498 U1.2@147.544,45.038 ; 146.881,37.144 cw(c146.085,36.348) U2.4@147.091,35.842 ; 146.881,37.144 cw(c146.085,36.348) U2.4@147.091,35.842 ; 146.881,37.144 cw(c146.085,36.348) U2.4@147.091,35.842 ; U2.4@147.226,36.002 ccw(c146.834,36.532) 147.493,36.532 ; U2.4@147.226,36.002 ccw(c146.834,36.532) 147.493,36.532 ; U2.4@147.226,36.002 ccw(c146.834,36.532) 147.493,36.532 ; U1.3@147.226,42.816 ccw(c146.458,43.584) 147.544,43.584 ; U1.3@147.226,42.816 ccw(c146.458,43.584) 147.544,43.584 ; U1.3@147.226,42.816 ccw(c146.458,43.584) 147.544,43.584 ; U1.2@147.226,44.72 cw(c146.458,43.951) 147.544,43.951 ; U1.2@147.226,44.72 cw(c146.458,43.951) 147.544,43.951 ; U1.2@147.226,44.72 cw(c146.458,43.951) 147.544,43.951 ; 147.493,36.532 ccw(c148.152,36.532) U2.4@147.761,36.002 ; 147.493,36.532 ccw(c148.152,36.532) U2.4@147.761,36.002 ; 147.493,36.532 ccw(c148.152,36.532) U2.4@147.761,36.002 ; 147.544,43.584 ccw(c148.63,43.584) U1.3@147.862,42.816 ; 147.544,43.584 ccw(c148.63,43.584) U1.3@147.862,42.816 ; 147.544,43.584 ccw(c148.63,43.584) U1.3@147.862,42.816 ; 147.544,43.951 cw(c148.63,43.951) U1.2@147.862,44.72 ; 147.544,43.951 cw(c148.63,43.951) U1.2@147.862,44.72 ; 147.544,43.951 cw(c148.63,43.951) U1.2@147.862,44.72
  Bottom Layer w0.8: v1(143.901,37.144) 143.901,38.854 U1.3@147.544,42.498 ; 146.776,41.73 cw(c147.544,40.961) U1.3@147.544,42.048 ; 146.776,41.73 ccw(c146.008,42.498) U1.3@147.094,42.498 ; 146.776,41.73 cw(c147.544,40.961) U1.3@147.544,42.048 ; 146.776,41.73 ccw(c146.008,42.498) U1.3@147.094,42.498 ; 146.776,41.73 cw(c147.544,40.961) U1.3@147.544,42.048 ; 146.776,41.73 ccw(c146.008,42.498) U1.3@147.094,42.498
RGB_A: JC1.3 U2.24 | length 119.3
  Top Layer w0.8: U2.24@114.473,20.4 114.473,19.077 115.625,17.925 120.775,17.925 126.875,11.825 126.875,5.413 129.188,3.1 176.2,3.1 179.875,6.775 179.875,21.025 186.3,27.45 186.3,32.025 185.455,32.87 JC1.3@184.11,32.87 ; U2.24@114.155,20.082 cw(c113.387,19.313) 114.473,19.313 ; U2.24@114.155,20.082 cw(c113.387,19.313) 114.473,19.313 ; U2.24@114.155,20.082 cw(c113.387,19.313) 114.473,19.313 ; 114.473,19.313 cw(c115.56,19.313) U2.24@114.791,20.082 ; 114.473,19.313 cw(c115.56,19.313) U2.24@114.791,20.082 ; 114.473,19.313 cw(c115.56,19.313) U2.24@114.791,20.082 ; JC1.3@184.428,32.552 cw(c185.196,31.784) 185.196,32.87 ; JC1.3@184.428,32.552 cw(c185.196,31.784) 185.196,32.87 ; JC1.3@184.428,32.552 cw(c185.196,31.784) 185.196,32.87 ; JC1.3@184.428,33.188 ccw(c185.196,33.956) 185.196,32.87 ; JC1.3@184.428,33.188 ccw(c185.196,33.956) 185.196,32.87 ; JC1.3@184.428,33.188 ccw(c185.196,33.956) 185.196,32.87
RGB_R: JC1.2 U2.7 | length 57.2
  Top Layer w0.8: U2.7@139.873,35.64 139.873,34.902 144.075,30.7 v1@150.975,30.7 ; U2.7@140.323,35.64 ccw(c143.191,35.64) 141.163,33.612 cw(c143.191,35.64) U2.7@140.323,35.64 ; 150.527,30.7 cw(c150.527,29.877) 151.109,30.459 ccw(c150.527,29.877) 150.527,30.7
  Bottom Layer w0.8: v1@151.65,30.625 165.525,30.625 169.35,34.45 178.72,34.45 JC1.2@181.57,31.6 ; 180.802,32.368 cw(c180.034,31.6) JC1.2@181.12,31.6 ; 180.802,32.368 ccw(c181.57,33.136) JC1.2@181.57,32.05 ; 180.802,32.368 cw(c180.034,31.6) JC1.2@181.12,31.6 ; 180.802,32.368 ccw(c181.57,33.136) JC1.2@181.57,32.05 ; 180.802,32.368 cw(c180.034,31.6) JC1.2@181.12,31.6 ; 180.802,32.368 ccw(c181.57,33.136) JC1.2@181.57,32.05
  other v1: 151.275,30.625
RGB_V: JC1.4 U2.8 | length 57.9
  Bottom Layer w0.8: U2.8@137.333,35.64 140.373,32.6 159.676,32.6 ; 159.8,32.6 159.676,32.6 ; JC1.4@181.57,34.14 179.885,35.825 167.375,35.825 165.753,34.203 161.28,34.203 159.676,32.6 ; U2.8@137.333,35.19 cw(c137.333,34.103) 138.101,34.872 ; U2.8@137.333,35.19 cw(c137.333,34.103) 138.101,34.872 ; U2.8@137.333,35.19 cw(c137.333,34.103) 138.101,34.872 ; U2.8@137.783,35.64 ccw(c138.87,35.64) 138.101,34.872 ; U2.8@137.783,35.64 ccw(c138.87,35.64) 138.101,34.872 ; U2.8@137.783,35.64 ccw(c138.87,35.64) 138.101,34.872 ; 180.802,34.908 cw(c180.034,34.14) JC1.4@181.12,34.14 ; 180.802,34.908 ccw(c181.57,35.676) JC1.4@181.57,34.59 ; 180.802,34.908 cw(c180.034,34.14) JC1.4@181.12,34.14 ; 180.802,34.908 ccw(c181.57,35.676) JC1.4@181.57,34.59 ; 180.802,34.908 cw(c180.034,34.14) JC1.4@181.12,34.14 ; 180.802,34.908 ccw(c181.57,35.676) JC1.4@181.57,34.59
RO_485: U1.1 U2.33 | length 65.6
  Top Layer w0.8: U2.33@137.333,20.4 137.333,23.383 140.2,26.25 153.122,26.25 158.398,31.526 158.398,46.914 155.971,49.342 149.308,49.342 U1.1@147.544,47.578 ; U2.33@137.015,20.718 ccw(c136.247,21.486) 137.333,21.486 ; U2.33@137.015,20.718 ccw(c136.247,21.486) 137.333,21.486 ; U2.33@137.015,20.718 ccw(c136.247,21.486) 137.333,21.486 ; 137.333,21.486 ccw(c138.42,21.486) U2.33@137.651,20.718 ; 137.333,21.486 ccw(c138.42,21.486) U2.33@137.651,20.718 ; 137.333,21.486 ccw(c138.42,21.486) U2.33@137.651,20.718 ; U1.1@147.544,48.028 ccw(c147.544,49.114) U1.1@148.312,48.346 ; U1.1@147.544,48.028 ccw(c147.544,49.114) U1.1@148.312,48.346 ; U1.1@147.544,48.028 ccw(c147.544,49.114) U1.1@148.312,48.346 ; U1.1@147.994,47.578 cw(c149.08,47.578) U1.1@148.312,48.346 ; U1.1@147.994,47.578 cw(c149.08,47.578) U1.1@148.312,48.346 ; U1.1@147.994,47.578 cw(c149.08,47.578) U1.1@148.312,48.346
VCC_IN: F1.2 J1.4 J1.8 | length 83.6
  Bottom Layer w1.5: J1.4@7.625,33.225 5.575,33.225 ; J1.8@7.625,41.625 5.025,41.625 4,40.6 4,34.8 ; F1.2@19.771,37.943 19.771,28.571 16.4,25.2 5.361,25.2 3.9,26.661 3.9,32.1 5.025,33.225 5.575,33.225 ; 4,34.8 ccw(c6.42,37.22) 7.409,33.943 cw(c6.42,37.22) 4,34.8 ; 4,34.8 5.575,33.225 ; 5.814,33.225 cw(c5.814,31.414) J1.4@7.095,32.695 ; 5.814,33.225 ccw(c5.814,35.036) J1.4@7.095,33.755 ; 5.814,33.225 cw(c5.814,31.414) J1.4@7.095,32.695 ; 5.814,33.225 ccw(c5.814,35.036) J1.4@7.095,33.755 ; 5.814,33.225 cw(c5.814,31.414) J1.4@7.095,32.695 ; 5.814,33.225 ccw(c5.814,35.036) J1.4@7.095,33.755 ; 5.814,33.225 cw(c5.814,31.414) J1.4@7.095,32.695 ; 5.814,33.225 ccw(c5.814,35.036) J1.4@7.095,33.755 ; 5.814,33.225 cw(c5.814,31.414) J1.4@7.095,32.695 ; 5.814,33.225 ccw(c5.814,35.036) J1.4@7.095,33.755 ; 5.814,33.225 cw(c5.814,31.414) J1.4@7.095,32.695 ; 5.814,33.225 ccw(c5.814,35.036) J1.4@7.095,33.755 ; 5.814,41.625 cw(c5.814,39.814) 7.095,41.095 ccw(c5.814,39.814) 5.814,41.625 ; 5.814,41.625 ccw(c5.814,43.436) 7.095,42.155 cw(c5.814,43.436) 5.814,41.625 ; 5.773,33.027 ccw(c7.242,34.496) 7.841,32.507 cw(c7.242,34.496) 5.773,33.027
VS: C11.1 P4.3 R13.2 | length 108.3
  Top Layer w0.8: C11.1@77.328,24.235 78.96,24.235 82.25,27.525 82.25,43.159 83.53,44.439 88.911,44.439 90.3,43.05 90.3,16.479 R13.2@90.091,16.27 ; C11.1@77.646,23.917 cw(c78.414,23.149) 78.414,24.235 ; C11.1@77.646,23.917 cw(c78.414,23.149) 78.414,24.235 ; C11.1@77.646,23.917 cw(c78.414,23.149) 78.414,24.235 ; C11.1@77.646,24.553 ccw(c78.414,25.321) 78.414,24.235 ; C11.1@77.646,24.553 ccw(c78.414,25.321) 78.414,24.235 ; C11.1@77.646,24.553 ccw(c78.414,25.321) 78.414,24.235 ; R13.2@89.773,16.588 ccw(c88.501,17.86) 90.3,17.86 ; R13.2@89.773,16.588 ccw(c88.501,17.86) 90.3,17.86 ; R13.2@89.773,16.588 ccw(c88.501,17.86) 90.3,17.86
  Bottom Layer w0.8: P4.3@46.92,25.155 47.84,24.235 C11.1@77.328,24.235 ; P4.3@46.92,24.705 cw(c46.92,23.619) 47.688,24.387 ; P4.3@46.92,24.705 cw(c46.92,23.619) 47.688,24.387 ; P4.3@46.92,24.705 cw(c46.92,23.619) 47.688,24.387 ; P4.3@47.37,25.155 ccw(c48.456,25.155) 47.688,24.387 ; P4.3@47.37,25.155 ccw(c48.456,25.155) 47.688,24.387 ; P4.3@47.37,25.155 ccw(c48.456,25.155) 47.688,24.387 ; 76.241,24.235 cw(c76.241,23.149) C11.1@77.009,23.917 ; 76.241,24.235 ccw(c76.241,25.321) C11.1@77.009,24.553 ; 76.241,24.235 cw(c76.241,23.149) C11.1@77.009,23.917 ; 76.241,24.235 ccw(c76.241,25.321) C11.1@77.009,24.553 ; 76.241,24.235 cw(c76.241,23.149) C11.1@77.009,23.917 ; 76.241,24.235 ccw(c76.241,25.321) C11.1@77.009,24.553
pads on no net: JC1.MH1 JC1.MH2 JC2.7 JC2.MH1 JC2.MH2 OP1.3 OP1.6 OP2.3 OP2.6 U2.20 U2.25 U2.26 U2.34 U2.35 U2.37

## Polygon pours and split planes (outlines as drawn)
no net on Top Layer "GND TOP" (solid, pour order 2): 0,54.5 195,54.5 195,0 0,0
no net on Bottom Layer "GND BOTTON" (solid, pour order 6): 0,54.5 195,54.5 195,0 0,0 0,54.5

## Silkscreen, mask and mechanical layers (free items; w line width, h text height)
Top Overlay:
  drawing of 866 lines, arcs and shapes, not listed
  text "DET2" at 176.932,44.911 h1.52 r270
  text "DET1" at 57,30.475 h1.52 r270
  text "DET3" at 177.1,14.775 h1.52 r270
  text "D@." at 3.625,4.525 h3
Mechanical 1:
  lines w0.254: 197.734,1.578 198.242,0.054 ; 197.734,52.988 198.242,54.512 ; 197.988,0.054 198.496,0.054 ; 197.988,54.512 198.496,54.512 ; 198.242,19.259 198.242,0.054 ; 198.242,35.307 198.242,54.512 ; 198.75,1.578 198.242,0.054 ; 198.75,52.988 198.242,54.512
  text "54.458 (mm)" at 199.157,19.513 h1.52 r90

## Text inside footprints (layer, text, board x,y; h text height)
U5: Top Overlay "5" at 56.185,41.485 h1.27 r270; Top Overlay "1" at 56.185,47.073 h1.27 r270